# EAGLE board LedBoardHome (EAGLE 6.4)
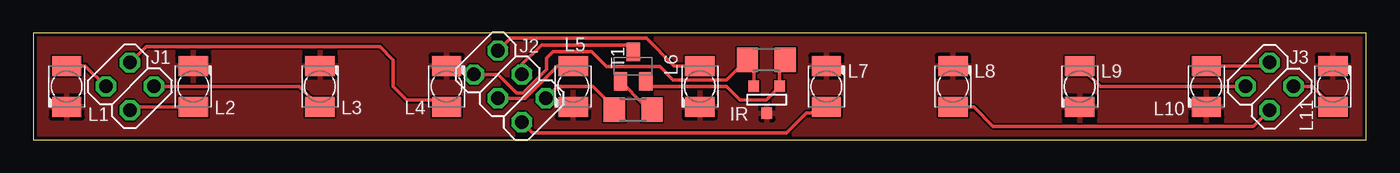
[diagram p0: board, top side]

Size 100 x 8 mm. Coordinates in mm from the lower left corner, seen from the top.
Outline: 0,0 100,0 100,8 0,8 0,0
Copper layers (1*16): Top 0.035mm / dielectric 1.5mm / Bottom 0.035mm
Design rules "dirt_cheap_dirty_boards.v1": minimum track width 5mil, minimum drill 12mil, track to track 5mil, track to pad 5mil, pad to pad 5mil, via to via 5mil, smd to smd 0mil, copper to edge 10mil, drill to drill 10mil, minimum pad ring 10mil, minimum via ring 6mil, stop-mask expansion 2mil, vias tented up to drill 25mil, thermal gap 10mil

## Footprints (pad centres in the part's own frame; a part is rotated, then mirrored left to right if it is on the bottom)
SOT-23 = smd 0.787 x 0.889: 1 0.991,1.016; 2 -0.94,1.016; 3 0.025,-1.016
2X02 = drill 1.016 octagon: 1 -1.27,-1.27; 2 -1.27,1.27; 3 1.27,-1.27; 4 1.27,1.27
2X03 = drill 1.016 octagon: 1 -2.54,-1.27; 2 -2.54,1.27; 3 0,-1.27; 4 0,1.27; 5 2.54,-1.27; 6 2.54,1.27
KA-3528ASYC = smd 1.5 x 2.2: A -1.55,0; C 1.55,0
R1206 = smd 1.6 x 1.803: 1 -1.422,0; 2 1.422,0
SOT23-BEC = smd 1 x 1.4: B -0.95,-1.1; C 0,1.1; E 0.95,-1.1

## Placement (x,y rotation side)
IR  IRLML6402  [SOT-23]  55,3 0 top
J1  [2X02]  7.25,4 135 top
J2  [2X03]  35.75,4 135 top
J3  [2X02]  92.75,4 315 top
L1  [KA-3528ASYC]  2.5,4 270 top
L2  [KA-3528ASYC]  12,4 90 top
L3  [KA-3528ASYC]  21.5,4 90 top
L4  [KA-3528ASYC]  31,4 90 top
L5  [KA-3528ASYC]  40.5,4 270 top
L6  [KA-3528ASYC]  50,4 270 top
L7  [KA-3528ASYC]  59.5,4 90 top
L8  [KA-3528ASYC]  69,4 90 top
L9  [KA-3528ASYC]  78.5,4 270 top
L10  [KA-3528ASYC]  88,4 270 top
L11  [KA-3528ASYC]  97.5,4 90 top
R1  10k  [R1206]  45,2.25 180 top
R2  10k  [R1206]  55,6 0 top
T1  [SOT23-BEC]  45,5.5 0 top

## Library data of the parts
IR = IRLML6402
J1-J3 = pinhead
L1-L11 = led
R1 R2 = resistor
T1 = transistor

## Nets
GND: IR.3 L1.C L2.C L3.C L4.C L5.C L6.C L7.C L8.C L9.C L10.C L11.C
GND_TRANS: J2.3 T1.C
N$1: J1.4 L1.A
N$2: IR.1 R2.2 T1.E
N$3: J1.2 L2.A
N$4: J1.1 L3.A
N$5: J1.3 L4.A
N$6: J2.4 L5.A
N$7: J2.5 L6.A
N$8: J3.4 L11.A
N$9: IR.2 J2.6 R2.1
N$10: R1.1 T1.B
N$11: J3.2 L10.A
N$12: J3.1 L9.A
N$13: J3.3 L8.A
N$14: J2.2 L7.A
N$15: J2.1 R1.2

## Tracks (layer width: path | path; a pad name or v marks a point on that pad's centre or on a via)
GND
  pour Top: 101,10 -1,10 -1.25,-2 100.75,-2
GND_TRANS
  Top 0.254: J2.3 36.65,5.65 38.12,7.12 44.48,7.12 T1.C
N$1
  Top 0.254: L1.A 3.9,5.55 J1.4
N$2
  Top 0.254: R2.2 55.99,5.57 IR.1 55.99,3.99 55,3 53,3 52,4 45.88,4 T1.E
N$3
  Top 0.254: L2.A 7.5,2.45 J1.2
N$4
  Top 0.254: J1.1 19.95,4 L3.A
N$5
  Top 0.254: L4.A 30.45,3 28,3 27,4 27,6 26,7 8.45,7 J1.3
N$6
  Top 0.254: L5.A 39.34,5.53 36.89,3.08 34.88,3.08 J2.4
N$7
  Top 0.254: L6.A 48.08,5.55 46.01,7.61 35.8,7.61 J2.5
N$8
  Top 0.254: J3.4 95.95,4 L11.A
N$9
  Top 0.254: IR.2 54.06,5.52 R2.1 53.5,6 52,4.5 48,4.5 47,5.5 43,5.5 41.88,6.62 39,6.62 38.5,6.12 38.5,5.25 36.75,3.5 36.25,3.5 34.85,4.9 J2.6
N$10
  Top 0.254: R1.1 45.83,2.62 T1.B
N$11
  Top 0.254: L10.A 92.5,5.55 J3.2
N$12
  Top 0.254: J3.1 80.05,4 L9.A
N$13
  Top 0.254: L8.A 70.55,2.45 72,1 91.55,1 J3.3
N$14
  Top 0.254: L7.A 59.05,2 58,2 56.5,0.5 37.45,0.5 J2.2
N$15
  Top 0.254: R1.2 43.58,2.42 42,4 39.34,4 J2.1